# Altium PCB CH595X-R0-1v1.PcbDoc
Units mil, origin at the board's own origin, x right, y up, seen from the top; angles counter-clockwise.
Board outline 3385.83 x 3110.24 mil, 2 copper layers (Top Layer, Bottom Layer); 43 components, 46 nets, 190 pads, 749 vias.
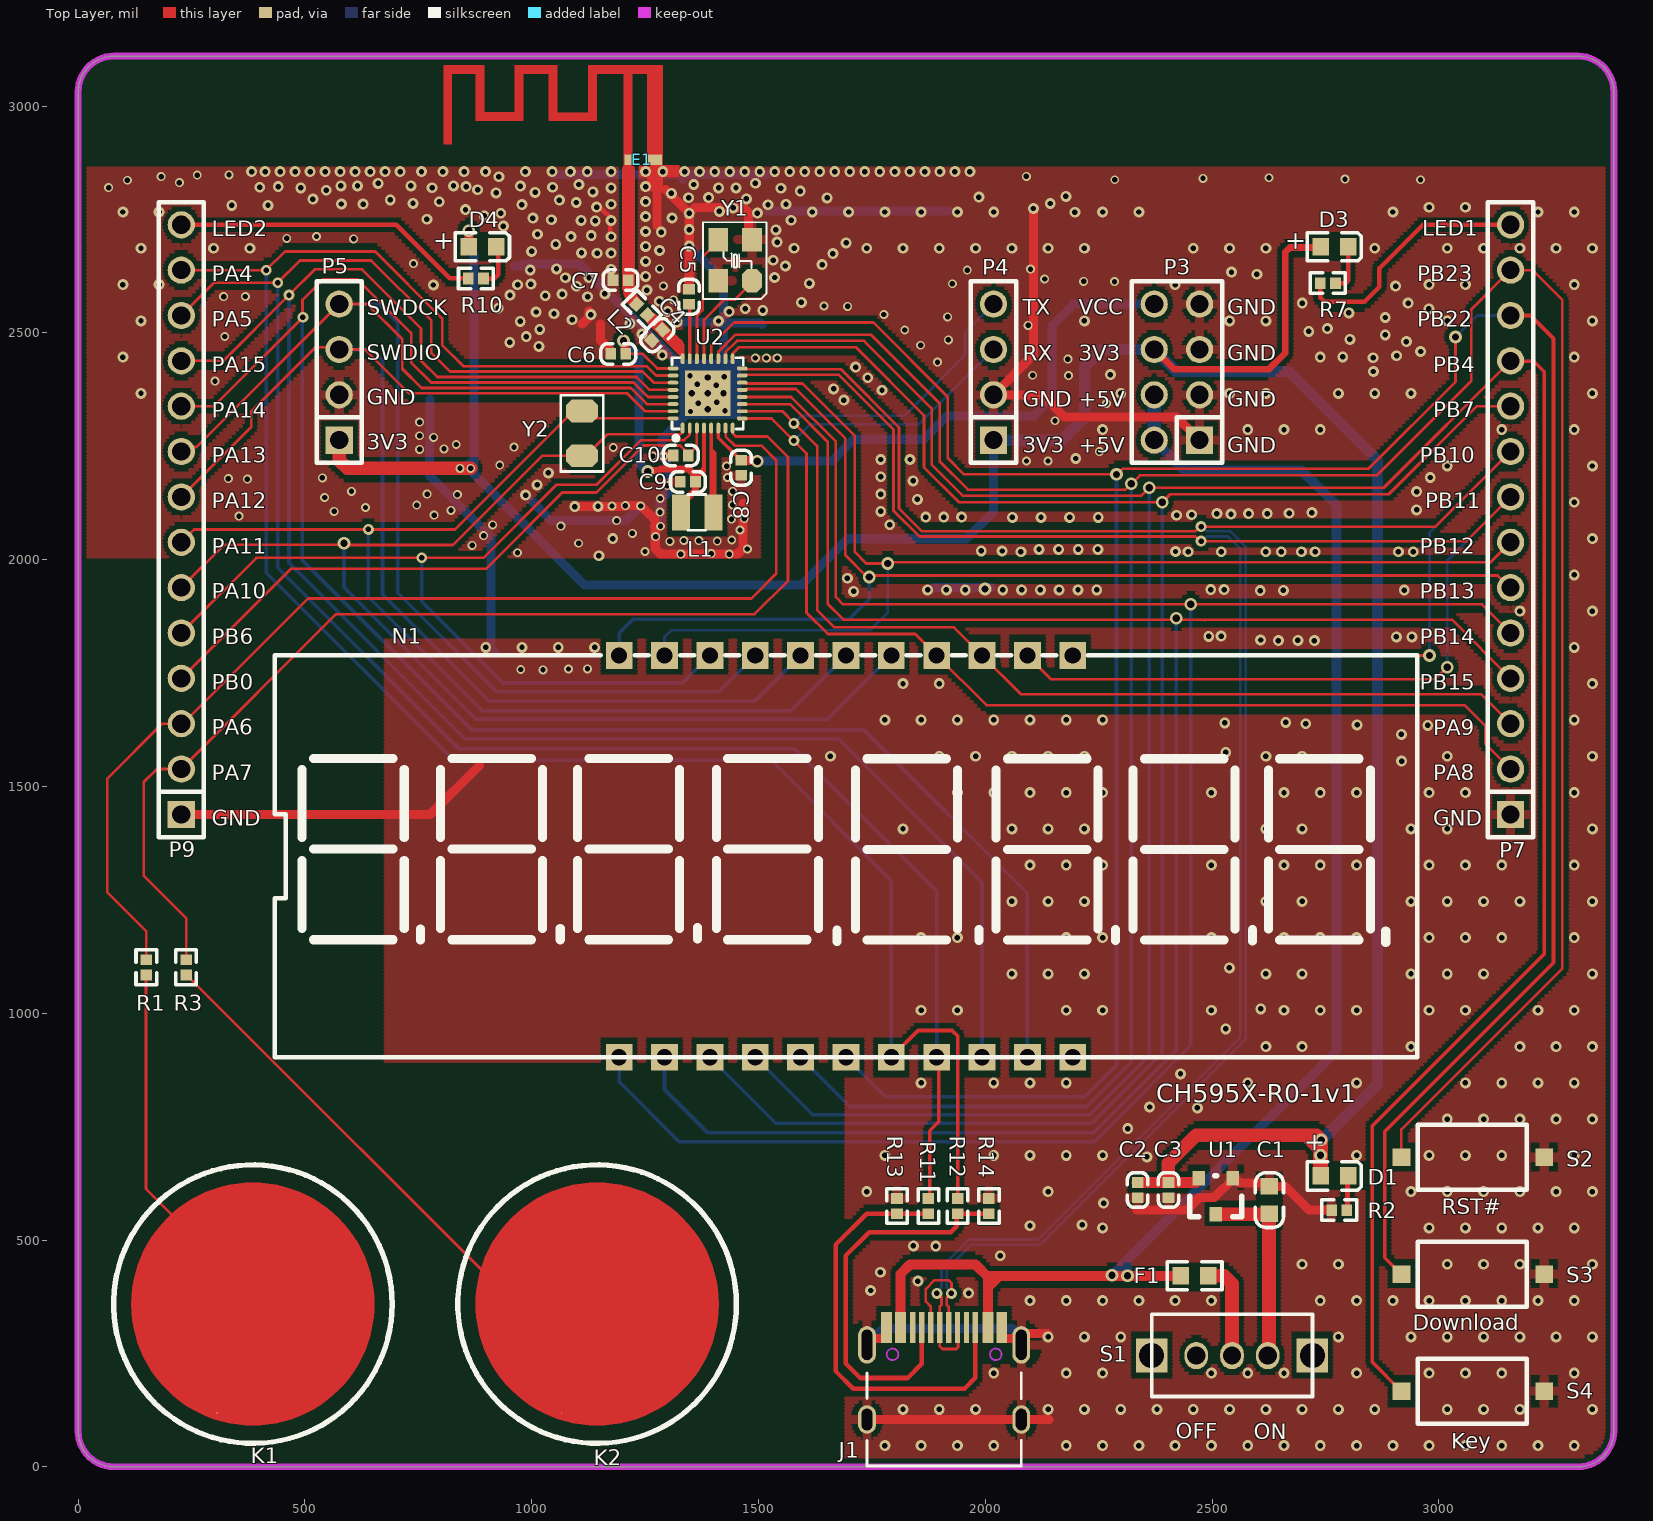
[diagram p0: Top Layer view]
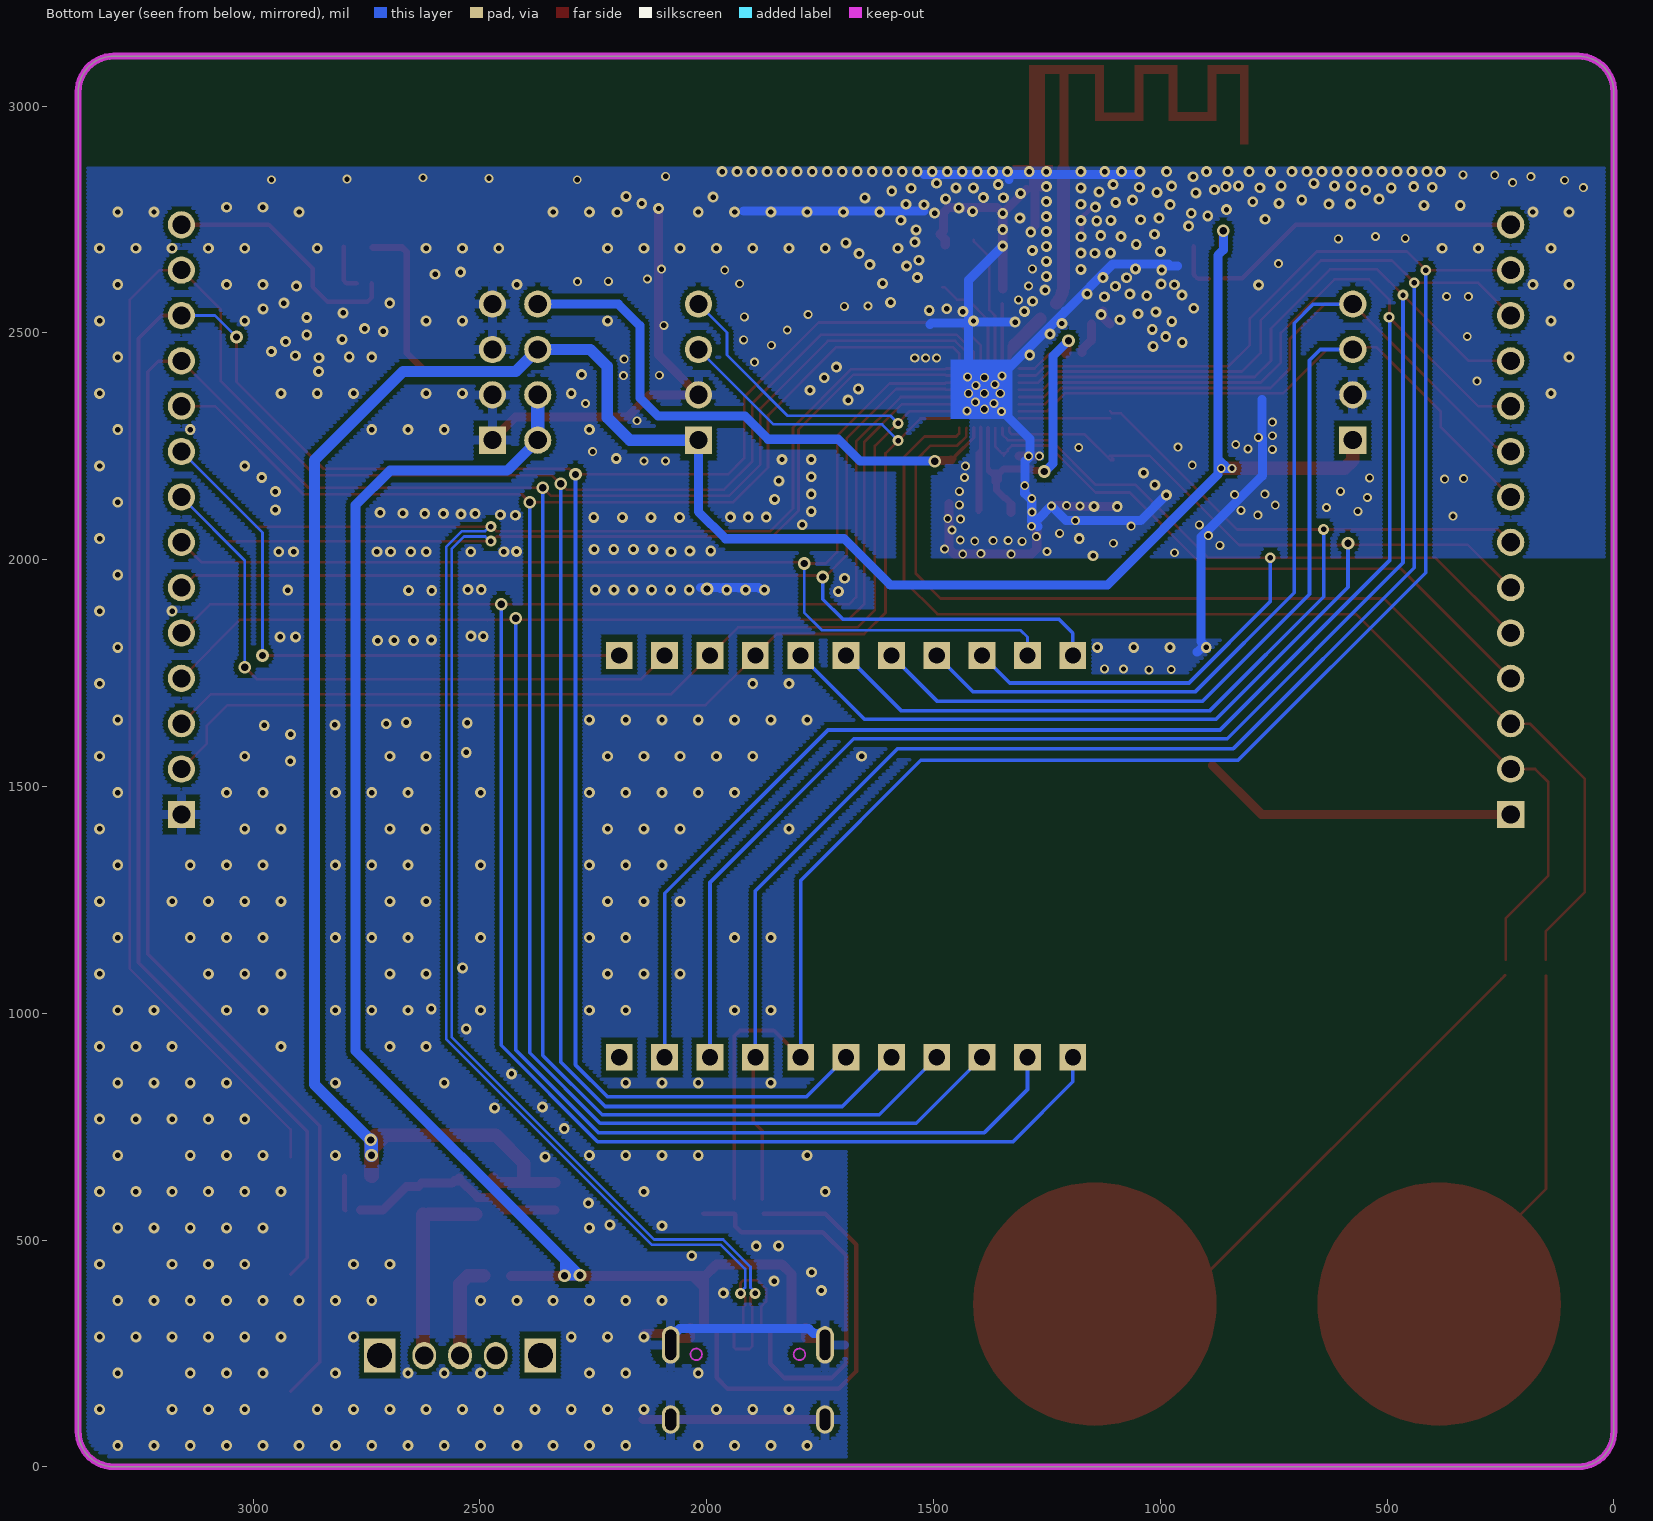
[diagram p1: Bottom Layer view, seen from below]

## Layer stack, top to bottom
Top Solder: solder mask 0.4, Solder Resist, Dk 3.5
Top Layer: signal copper 1.4
Dielectric 1: dielectric 12.6, FR-4, Dk 4.8
Bottom Layer: signal copper 1.4
Bottom Solder: solder mask 0.4, Solder Resist, Dk 3.5

## Board outline
0,78.74 ccw(c78.74,78.74) 78.74,0 3307.29,0 3307.09,0 ccw(c3307.09,78.74) 3385.83,78.74 3385.83,3031.5 ccw(c3307.09,3031.5) 3307.09,3110.24 78.74,3110.24 ccw(c78.74,3031.5) 0,3031.5

## Design rules (kind name [scope] priority, off if disabled: settings)
Clearance Clearance_2 [InNet('ANT')OR InNet('NetE1_1') OR InNet('NetC7_2') vs InPolygon] p1: gap=6 ignorepadtopadclearanceinfootprint=FALSE
Clearance Clearance_1 [InPolygon] p2: gap=10 ignorepadtopadclearanceinfootprint=FALSE
Clearance [All] p3: gap=6 ignorepadtopadclearanceinfootprint=FALSE except(8: Arc-Via Track-Via SMDPad-Via THPad-Via Via-Via Via-Fill Via-Poly Via-Region Via-Hole)
ComponentClearance [All] p1 off: gap=10 collisioncheckmode=3 verticalgap=10 showdistances=FALSE
DiffPairsRouting [All] p1: maxlimit=10 minlimit=6 mostfreqgap=8 toplayer_minwidth=6 toplayer_maxwidth=15 toplayer_prefwidth=8 bottomlayer_minwidth=6 bottomlayer_maxwidth=15 bottomlayer_prefwidth=8 maxuncoupledlength=500
MinimumSolderMaskSliver [All] p1 off: minsoldermaskwidth=10
PolygonConnect PolygonConnect_2 [InComponentClass('New Class')] p1: connectstyle=Direct reliefconductorwidth=10 reliefentries=4 polygonreliefangle="90 Angle" airgapwidth=10
PolygonConnect PolygonConnect_1 [IsVia] p2: connectstyle=Direct reliefconductorwidth=10 reliefentries=4 polygonreliefangle="90 Angle" airgapwidth=10
PolygonConnect [All] p3: connectstyle=Relief reliefconductorwidth=20 reliefentries=4 polygonreliefangle="90 Angle" airgapwidth=10
RoutingVias [All] p1: holewidth=16 width=28 viastyle="Through Hole" minholewidth=11.81 minwidth=19.68 maxholewidth=28 maxwidth=50
SilkToSilkClearance [All] p1 off: silktosilkclearance=10
SilkToSolderMaskClearance [IsPad] p1 off: minsilkscreentomaskgap=10 clearancetoexposedcopper=TRUE
SolderMaskExpansion [All] p1: expansion=2 istentingtop=FALSE
Width [All] p1: maxlimit=100 minlimit=6 preferedwidth=10
25 further rules are at their usual default settings.

## Classes and differential pairs
component class "New Class": C4 C7
differential pair NewDifferentialPair2: +PB10 -PB11

## Components (designator, comment, footprint, x,y, rotation, side; value= is the part's Value field where it differs from the comment)
C1 "10uF" 0603_C 2626.57,557.73 r90 top
C2 "2.2uF" 0402_C 2336.11,626.9 r0 top
C3 "0.1uF" 0402_C 2404.01,626.9 r0 top
C4 "NC" 0402_C 1265.07,2483.18 r135 top
C5 "0.47uF" 0402_C 1346.78,2562.84 r180 top
C6 "0.1uF" 0402_C 1207.61,2453.74 r270 top
C7 "NC" 0402_C 1179.19,2616.48 r90 top
C8 "2.2uF" 0402_C 1461.94,2186.02 r180 top
C9 "4.7uF" 0402_C 1327.8,2171.46 r90 top
C10 "1nF" 0402_C 1311.95,2229.77 r90 top
D1 "power" 0603+ 2739.99,641.25 r0 top
D3 "LED1" 0603+ 2739.99,2689.81 r0 top
D4 "LED2" 0603+ 861.67,2689.81 r0 top
E1 "ANTENNA" ANT-F-1-2.4G-1.6mmFR4 1213.08,2882.04 r0 top
F1 "500mA" 0603 2431.29,421.09 r0 top
J1 "TYPE-C-Receptacle-2.0" TYPE-C-Receptacle-2.0 1909.45,307.03 r0 top
K1 "TOUCHKEY" TOUCHKEY-13.6mm-S 385.33,358.74 r90 top
K2 "TOUCHKEY" TOUCHKEY-13.6mm-S 1144.33,358.74 r90 top
L1 "10uH" SMD_2x2mm 1365.25,2104.16 r180 top
L2 "0" 0402 1231.37,2563.23 r315 top
N1 "GDC0103T" EDC103 1192.91,903.01 r0 top
P3 "HEADER 4x2" IDC8-2.54mm 2472.65,2263.51 r180 top
P4 "HEADER 4" SIP4-2.54mm 2018.32,2263.51 r180 top
P5 "HEADER 4" SIP4-2.54mm 575.69,2263.51 r180 top
P7 "Header 14" SIP14-2.54mm 3158.35,1438.35 r180 top
P9 "Header 14" SIP14-2.54mm 227.48,1438.35 r180 top
R1 "0Ω" 0402 150.33,1117.85 r270 top
R2 "1K" 0402 2797.31,565.84 r180 top
R3 "0Ω" 0402 238.3,1117.85 r270 top
R7 "1K" 0402 2738.61,2609.74 r0 top
R10 "1K" 0402 860.29,2619.81 r0 top
R11 "NC(0)" 0402 1874.49,591.63 r270 top
R12 "NC(0)" 0402 1939.12,591.63 r270 top
R13 "5.1K (5101) ±1%" 0402 1805.45,558.17 r90 top
R14 "5.1K (5101) ±1%" 0402 2008.16,558.17 r90 top
S1 "SW SPDT" SW1 2544.09,245.2 r180 top
S2 "RST#" SMD_6.1x3.65x2.5mm-KEY 3232.43,682.54 r180 top
S3 "Download" SMD_6.1x3.65x2.5mm-KEY 3232.43,424.63 r180 top
S4 "Key" SMD_6.1x3.65x2.5mm-KEY 3232.43,166.71 r180 top
U1 "6219P33M" SOT-23 2545.7,636.42 r180 top
U2 "CH595X" QFN32_4X4 1387.92,2366.55 r0 top
Y1 "32M" XT3225 1485.88,2614.95 r90 top
Y2 "32.768K" fc-135 1111.11,2229.34 r90 top

## Footprints (in the part's own frame and the unit in brackets; to place one, negate y for a bottom-side part, rotate by r counter-clockwise, add the part's x,y. Pads: shape width x height; smd on the part's side, far side on the other; paste and mask are expansions set on the pad)
0402 [mm]
  rect 0.6x0.65 smd mask+0.051: 1(0,0) 2(0.85,0)
  silkscreen extent -0.55,-0.58 1.4,0.57
0402_C [mm]
  rect 0.65x0.6 smd mask+0.051: 1(0,0) 2(0,-0.85)
  silkscreen extent -0.58,-1.4 0.57,0.55
0603 [mm]
  rect 0.93x0.98 smd: 1(0,0) 2(1.54,0)
  silkscreen extent -0.76,-0.79 2.3,0.79
0603+ [mm]
  rect 0.93x0.98 smd: 1(0,0) 2(1.54,0)
  silkscreen extent -0.76,-0.79 2.27,0.79
0603_C [mm]
  rect 0.93x0.98 smd mask+0.051: 1(0,0) 2(1.54,0)
  silkscreen extent -0.76,-0.79 2.31,0.79
ANT-F-1-2.4G-1.6mmFR4 [mm]
  rect 0.8x0.6 smd mask+0: 0(1.483,0)
  rect 0.4x0.6 smd mask+0: 1(0,0)
  Top Layer region: 0.24,5.027 -0.26,5.027 -0.26,-0.304 0.24,-0.304
  Top Layer region: 1.94,5.002 1.04,5.002 1.04,-0.304 1.94,-0.304
  Top Layer region: 1.94,5.296 -2.26,5.296 -2.26,4.796 1.94,4.796
  Top Layer region: -1.76,4.977 -2.26,4.977 -2.26,2.157 -1.76,2.157
  Top Layer region: -1.85,2.651 -4.39,2.651 -4.39,2.156 -1.85,2.156
  Top Layer region: -3.96,4.976 -4.46,4.976 -4.46,2.156 -3.96,2.156
  Top Layer region: -3.96,5.296 -6.36,5.296 -6.36,4.796 -3.96,4.796
  Top Layer region: -5.86,4.977 -6.36,4.977 -6.36,2.157 -5.86,2.157
  Top Layer region: -5.875,2.657 -8.364,2.657 -8.364,2.157 -5.875,2.157
  Top Layer region: -8.06,4.977 -8.56,4.977 -8.56,2.157 -8.06,2.157
  Top Layer region: -8.06,5.296 -10.36,5.296 -10.36,4.796 -8.06,4.796
  Top Layer region: -9.86,4.976 -10.36,4.976 -10.36,0.856 -9.86,0.856
EDC103 [mm]
  rect 1.5x1.5 hole 0.9: 1(0,0) 2(2.54,0) 3(5.08,0) 4(7.62,0) 5(10.16,0) 6(12.7,0) 7(15.24,0) 8(17.78,0) 9(20.32,0) 10(22.86,0) 11(25.4,0) 12(25.4,22.5) 13(22.86,22.5) 14(20.32,22.5) 15(17.78,22.5) 16(15.24,22.5) 17(12.7,22.5) 18(10.16,22.5) 19(7.62,22.5) 20(5.08,22.5) 21(2.54,22.5) 22(0,22.5)
  silkscreen extent -19.3,0 44.7,22.5
fc-135 [mil]
  oct 50x70 smd: 1(0,0) 2(98.43,0)
  silkscreen extent -35,-47 133,47
IDC8-2.54mm [mil]
  rect 60x60 hole 40: 1(0,0)
  round 60 hole 40: 2(100,0) 3(0,-100) 4(100,-100) 5(0,-200) 6(100,-200) 7(0,-300) 8(100,-300)
  silkscreen extent -50,-350 150,50
QFN32_4X4 [mm]
  rect 2.54x2.54 smd mask+0.051: 0(0,0)
  round 0.508 hole 0.356: 0(0,0)
  oval 0.22x0.6 smd mask+0.051: 1(-1.4,-1.936) 2(-1,-1.936) 3(-0.6,-1.936) 4(-0.2,-1.936) 5(0.2,-1.936) 6(0.6,-1.936) 7(1,-1.936) 8(1.4,-1.936) 17(1.4,1.936) 18(1,1.936) 19(0.6,1.936) 20(0.2,1.936) 21(-0.2,1.936) 22(-0.6,1.936) 23(-1,1.936) 24(-1.4,1.936)
  oval 0.6x0.22 smd mask+0.051: 9(1.936,-1.4) 10(1.936,-1) 11(1.936,-0.6) 12(1.936,-0.2) 13(1.936,0.2) 14(1.936,0.6) 15(1.936,1) 16(1.936,1.4) 25(-1.936,1.4) 26(-1.936,1) 27(-1.936,0.6) 28(-1.936,0.2) 29(-1.936,-0.2) 30(-1.936,-0.6) 31(-1.936,-1) 32(-1.936,-1.4)
  silkscreen extent -2,-2.63 2,2
SIP4-2.54mm [mil]
  rect 60x60 hole 40: 1(0,0)
  round 60 hole 40: 2(0,-100) 3(0,-200) 4(0,-300)
  silkscreen extent -50,-350 50,50
SIP14-2.54mm [mil]
  rect 60x60 hole 40: 1(0,0)
  round 60 hole 40: 2(0,-100) 3(0,-200) 4(0,-300) 5(0,-400) 6(0,-500) 7(0,-600) 8(0,-700) 9(0,-800) 10(0,-900) 11(0,-1000) 12(0,-1100) 13(0,-1200) 14(0,-1300)
  silkscreen extent -50,-1350 50,50
SMD_2x2mm [mm]
  rect 1x2 smd: 1(-0.905,0) 2(0.905,0)
  silkscreen extent -0.47,-1 0.53,1
SMD_6.1x3.65x2.5mm-KEY [mm]
  rect 1x1 smd: 1(0,0) 2(8,0)
  silkscreen extent 0.98,-1.83 7.08,1.83
SOT-23 [mm]
  rect 0.7x0.8 smd: 1(0,0) 2(1.9,0) 3(0.95,2.02)
  silkscreen extent -0.51,-0.13 2.41,2.16
SW1 [mm]
  rect 1.75x1.9 hole 1.4: 0(-4.5,0) 0(4.5,0)
  oval 1.321x1.524 hole 1.016: 1(0,0) 2(-2,0) 3(2,0)
  silkscreen extent -4.51,-2.31 4.5,2.29
TOUCHKEY-13.6mm-S [mil]
  round 2 smd: 1(-239.72,79.09)
  Top Layer region: -267.72,0 -247.34,-102.45 -189.3,-189.3 -102.45,-247.34 0,-267.72 0,-267.72 102.45,-247.34 189.3,-189.3 247.34,-102.45 267.72,0 267.72,0 247.34,102.45 189.3,189.3 102.45,247.34 0,267.72 0,267.72 -102.45,247.34 -189.3,189.3 -247.34,102.45 -267.72,0
  silkscreen extent -307,-307 307,307
TYPE-C-Receptacle-2.0 [mm]
  oval 1x1.6 hole 0.6 slot 1.2 at 90 deg: 0(-4.32,-5.15) 0(4.32,-5.15)
  oval 1x2.1 hole 0.6 slot 1.7 at 90 deg: 0(-4.32,-0.97) 0(4.32,-0.97)
  rect 0.6x1.75 smd mask+0.051: A1(-3.225,0) A4(-2.45,0) B1(3.225,0) B4(2.45,0)
  rect 0.3x1.75 smd mask+0.051: A5(-1.25,0) A6(-0.25,0) A7(0.25,0) A8(1.25,0) B5(1.75,0) B6(0.75,0) B7(-0.75,0) B8(-1.75,0)
  Keep-Out Layer circle w0.1: c2.89,-1.5 r0.325
  Keep-Out Layer circle w0.1: c-2.89,-1.5 r0.325
  silkscreen extent -4.32,-7.75 4.32,-2.55
XT3225 [mm]
  oct 1.3x1.1 smd: 1(0,0)
  rect 1.3x1.1 smd: 2(2.3,0) 3(2.3,1.9) 4(0,1.9)
  silkscreen extent -1.02,-0.8 3.27,2.74

## Part data
C1 C2 C3 C4 C5 C6 C7 C8 C9 C10: library part CAP, "Capacitor"
D1: library part LED0, "Typical INFRARED GaAs LED", LatestRevisionDate=08-Jul-2005, LatestRevisionNote="Mech Layer 1 removed.", PackageDescription="LED; 2 Leads", PackageReference=LED-0, Published=8-Jun-2000, Publisher="Altium Limited"
D3 D4: library part LED
E1: "Generic Antenna"
F1: library part FUSE1, "Fuse"
J1: "Type-C USB2.0 母座"
L1 L2: library part INDUCTOR
N1: library part EDC103
P3: "Header, 4-Pin, Dual row"
P7 P9: "Header, 14-Pin", LatestRevisionDate=17-Jul-2002, LatestRevisionNote="Re-released for DXP Platform.", Publisher="Altium Limited"
R1 R3: library part "Res Semi", "Semiconductor Resistor", LatestRevisionDate=17-Jul-2002, LatestRevisionNote="Re-released for DXP Platform.", PackageReference=AXIAL-0.5, Published=8-Jun-2000, Publisher="Altium Limited"
R2 R7 R10 R11 R12 R13 R14: library part RES
S2 S3 S4: library part KEY1
U2: "RISC-V MCU with BLE/USB/ADC/SPI/4*UART/I2C/LCD/LEDC"
Y1 Y2: library part XTAL, "Crystal Oscillator", LatestRevisionDate=17-Jul-2002, LatestRevisionNote="Re-released for DXP Platform.", PackageDescription="Crystal, Thru-Hole; 2 Leads; Body 3.1 x 8.2 mm (Dia.xH)", PackageReference=R38, Published=8-Jun-2000, Publisher="Altium Limited"

## Via types
v1: diameter 24, hole 12, Top Layer to Bottom Layer, tented both sides, 604 vias
v2: diameter 19.68, hole 11.81, Top Layer to Bottom Layer, tented both sides, 117 vias
v3: diameter 28, hole 16, Top Layer to Bottom Layer, tented both sides, 21 vias
v4: diameter 20, hole 14, Top Layer to Bottom Layer, tented both sides, 4 vias
v5: diameter 20, hole 12, Top Layer to Bottom Layer, tented both sides, 3 vias

## Nets (pads, with @x,y where several pads share a name; then routed paths per layer and width w, separated by ;. In a path a pad name is that pad's centre, name@x,y a point inside that pad or via, vN(x,y) a via of type N, cw(c..) or ccw(c..) an arc to the next point about the centre after c; other vN are vias at no path point)
3V3: C2.1 C3.1 D1.1 D3.1 D4.1 P3.6 P4.1 P5.1 U1.2 | length 6468
  Top Layer w15: P3.6 2416.15,2420.01 2625.71,2420.01 2661.43,2455.73 2661.43,2678.31 2671.58,2688.46 D3.1@2736.4,2688.46
  Top Layer w20: D4.1@860.74,2691.62 861.39,2692.27 861.39,2724.67 v3(861.11,2724.95)
  Top Layer w25: C2.1@2335.02,626.97 2403.36,626.97 2463.12,626.97 2469.32,633.17 2469.61,633.17 2469.61,633.46 2470.89,634.74 U1.2
  Top Layer w30: P5.1 575.69,2218.91 593.26,2201.33 v2(842.03,2201.33) v2(865.65,2201.33) ; C3.1@2403.36,629.97 2403.36,669.51 2464.88,731.03 2707.43,731.03 ; D1.1@2738.06,641.25 2738.06,700.4 2707.43,731.03 ; D1.1 2740.58,641.83 v3(2740.58,720.75) 2730.29,731.03 2707.43,731.03
  Bottom Layer w20: v2(842.03,2201.33) 851.64,2201.33 v2(865.65,2201.33) ; 858.65,2208.34 873.03,2222.72 ; v3(861.11,2724.95) 861.11,2682.87 873.03,2670.95 873.03,2222.72 ; 872.94,2187.81 1116.25,1944.5 1595.41,1944.5 1697.06,2046.15 1958.48,2046.15 2018.32,2105.99 P4.1 ; 873.03,2187.9 873.03,2201.33 873.03,2222.72
  Bottom Layer w25: P4.1 2169.94,2263.51 2219.55,2313.12 2219.55,2426.22 2256.84,2463.51 P3.6 2421.15,2415.01 2669.53,2415.01 2864.72,2219.82 2864.72,843.13 2743.84,722.25 2742.89,722.25 2741.77,721.13 v3@2741.77,720.18
  Bottom Layer w30: v3(2739.32,686.81) 2739.32,718.68 v3@2741.77,721.13
+5V: F1.1 J1.A4 J1.B4 P3.2 P3.4 | length 3437
  Top Layer w22: J1.A4 1812.99,424.98 1833.68,445.68 1979.01,445.68 2005.91,418.77 ; J1.B4 2005.91,395.59 ; v3(2313.53,421.08) 2279.56,421.09 2031.41,421.09 ; v3(2313.53,421.08) F1.1 ; 2005.91,395.59 2005.91,418.77 ; 2005.91,395.59 2031.41,421.09 ; 2005.91,418.77 2007.53,418.77 2009.85,421.09 2031.41,421.09
  Bottom Layer w22: v3(2313.53,421.08) v3@2312.91,421.7 ; P3.2 2440.01,2196.15 2698.56,2196.15 2774.22,2120.49 2774.22,916.97 2312.91,455.66 ; v3@2312.91,421.7 2312.91,455.66 ; v3@2312.91,421.7 2280.18,421.7 v3(2279.56,422.31) 2312.91,455.66
  Bottom Layer w30: P3.2 P3.4
ANT: C4.2 L2.2 U2.24 | length 184.8
  Top Layer w8: 1313.48,2467.6 1328.92,2452.15 cw(c1319.54,2442.77) U2.24 U2.24@1332.8,2445.36 ; 1320.7,2474.58 cw(c1291.48,2445.36) U2.24@1332.8,2445.36 ; 1327.5,2482.04 cw(c1314.68,2469.23) 1332.8,2469.23 U2.24@1332.8,2445.36
  Top Layer w28.1: 1264.59,2530.69 1320.7,2474.58
BOOT: N1.6 P7.12 S3.2 U2.20 | length 6545.8
  Top Layer w6: U2.20 1395.8,2472.57 1446.28,2523.06 1753.22,2523.06 1917.34,2358.94 1917.34,2223.71 1952.89,2188.16 2291.53,2188.16 2303.93,2200.56 2845.54,2200.56 3036.73,2391.74 v3(3036.73,2490.94)
  Top Layer w8: S3.2 2880.95,461.14 2880.95,739.4 3252.94,1111.38 3252.94,2487.43 3202.02,2538.35 P7.12
  Bottom Layer w6: v3(3036.73,2490.94) 3084.14,2538.35 P7.12
  Bottom Layer w8: N1.6 1780.2,815.73 2219.05,815.73 2289.41,886.09 2289.41,1367.61 v3(2289.41,2188.05)
CC1: J1.A5 R12.2 R14.1 | length 881.3
  Top Layer w10: J1.A5 1860.24,227.02 1829.03,195.8 1724.16,195.8 1691.96,228.01 1691.96,464.98 1744.41,517.44 1924,517.44 1937.28,530.72 1937.28,556.33 R12.2 R14.1
CC2: J1.B5 R11.2 R13.1 | length 957.3
  Top Layer w10: R13.1@1804.47,558.17 R11.2 ; R13.1 1738.55,558.17 1669.97,489.58 1669.97,211.17 1708.76,172.38 1954.27,172.38 1978.35,196.46 J1.B5
GND: C1.2 C2.2 C3.2 C4.1 C5.2 C6.2 C7.1 C8.1 C9.1 C10.1 E1.0 J1.0 J1.A1 J1.B1 P3.1 P3.3 P3.5 P3.7 P4.2 P5.2 P7.1 P9.1 R2.2 R13.2 R14.2 S2.1 S3.1 S4.1 U1.1 U2.0 Y1.2 Y1.4 | length 7910.7
  Top Layer w10: v1(1143.16,2777.2) 1145.84,2774.52 1152.49,2774.52 1164.66,2762.35 1165.95,2762.35 1173.02,2755.28 v1@1173.02,2706.7 ; v2(1266.68,2228.24) v2@1267.45,2229.01 ; C10.1@1311.18,2229.01 C10.1
  Top Layer w20: P9.1 776.99,1438.35 884.72,1546.08 ; v1(1095.02,2117.02) 1095.17,2117.17 1146.1,2117.17 v1(1146.25,2117.32) 1176.34,2117.32 1176.6,2117.59 1205.05,2117.59 v2(1206.51,2119.05) 1240.88,2119.05 1272.18,2087.75 ; 1111.11,2519.62 1129.81,2538.33 v1@1129.54,2538.6 ; v1@1126.68,2535.74 v1@1126.68,2548.58 ; 1152.11,2519.62 1152.11,2483.83 1172.33,2463.6 C6.2@1172.33,2456.54 ; v2@1267.45,2229.01 C10.1@1311.18,2229.01 ; 1271.17,2073.36 1271.17,2072.59 1272.4,2071.36 ; 1272.18,2071.36 1272.18,2071.75 ; 1272.4,2083.36 1272.4,2024.21 1284.11,2012.49 1454.09,2012.49 1465.8,2024.21 1465.8,2124 ; 1276.68,2736.41 E1.0@1276.68,2871.58 ; 1294.68,2816.41 v1(1347.44,2763.65) ; C5.2@1347.44,2596.97 v1(1347.44,2727.64) v1(1347.44,2763.65) ; Y1.2@1474.22,2694.04 1474.22,2705.85 1485.88,2717.5 1477.99,2725.39 1477.99,2765.05 1466.27,2776.76 1360.56,2776.76 v1(1347.44,2763.65) ; J1.0@1739.37,104.28 2079.53,104.28 2140.41,104.28 ; J1.0@1739.37,268.84 1739.37,273.64 1748.32,282.58 1780.67,282.58 1782.48,284.39 J1.A1 ; J1.B1 2036.42,284.39 2038.23,282.58 2076.86,282.58 J1.0@2079.53,285.26 ; J1.0@2079.53,268.84 J1.0@2079.53,285.26 ; v1(2106.15,2774.25) 2106.47,2773.92 2106.47,2496.07 2106.47,2451.67 P4.2 2125.51,2363.51 2174.39,2314.63 2421.53,2314.63 P3.1 ; v1@2136.74,294.2 2088.48,294.2 J1.0@2079.53,285.26 ; 2335.02,566.34 2444.88,566.34 2472.41,593.87 2505.12,593.87 U1.1@2545.7,634.45 ; U1.1 U1.1@2545.7,634.45 ; R2.2 2714.29,565.84 2661.77,618.36 2635.86,618.36 2628.66,625.55 2561.19,625.55 2556.08,630.67 2549.48,630.67 U1.1@2545.7,634.45
  Bottom Layer w20: 775.67,2352.77 775.67,2267.55 775.11,2266.99 775.11,2184.98 910.34,2049.75 910.34,1819.3 898.7,1807.66 v1(898.7,1806.58) ; v1@898.48,1807.89 v1@900.01,1807.89 ; v1@903.6,1811.48 919,1796.08 ; 961.69,2647.69 981.62,2647.69 ; 981.62,2652.16 1104.33,2652.16 1207.9,2548.58 1210.44,2548.58 1210.44,2546.04 1387.92,2368.56 1387.92,2366.55 v2@1352.95,2331.58 ; v1(986.65,2142.52) 1043.15,2086.02 1207.68,2086.02 v2(1240.13,2118.47) 1269.23,2089.36 ; v1@1049.13,2849.01 v1@1334.02,2849.01 ; 1269.23,2073.36 1271.17,2073.36 1283.48,2085.66 1283.48,2130.84 1298.85,2146.21 1298.85,2159.22 v2@1298.16,2159.92 ; 1298.16,2175.92 1298.16,2217.3 1287.22,2228.24 1287.22,2265.85 1352.92,2331.55 v2@1352.92,2331.62 ; v1(1320.11,2523.9) 1420.78,2523.9 v1@1422.92,2521.76 ; 1334.02,2838.69 v1@1334.02,2849.01 ; v1(1347.44,2691.63) 1422.92,2616.15 v1@1422.92,2521.76 ; v2@1422.92,2401.49 v1@1422.92,2521.76 ; 1508.08,2518.3 1504.63,2521.76 v1@1422.92,2521.76 ; 1521,2769.01 1918.39,2769.01 ; 1521,2849.01 v1@1334.02,2849.01 ; J1.0@1739.37,268.84 1739.37,285.26 1748.32,294.2 1764.73,294.2 1775.19,304.66 2060.12,304.66 2079.53,285.26 J1.0@2079.53,268.84 ; v1@1884,1936.8 1885.92,1938.73 1925.18,1938.73 1926.21,1937.7 1928.78,1937.7 1929.8,1938.73 1964.11,1938.73 1966.43,1936.41 1967.19,1936.41 1968.28,1937.49 1969.36,1936.41 1970.12,1936.41 1972.44,1938.73 2013.18,1938.73
  other v1: 1778.7,46.58 1858.7,46.58 1938.7,46.58 2018.7,46.58 2178.7,46.58 2258.7,46.58 2338.7,46.58 2418.7,46.58 2498.7,46.58 2578.7,46.58 2658.7,46.58 2738.7,46.58 2818.7,46.58 2898.7,46.58 2978.7,46.58 3058.7,46.58 3138.7,46.58 3218.7,46.58 3298.7,46.58 1818.7,126.58 1898.7,126.58 1978.7,126.58 2138.7,126.58 2218.7,126.58 2298.7,126.58 2378.7,126.58 2458.7,126.58 2538.7,126.58 2618.7,126.58 2698.7,126.58 2778.7,126.58 2858.7,126.58 3018.7,126.58 3098.7,126.58 3178.7,126.58 3338.7,126.58 2018.7,206.58 2178.7,206.58 2258.7,206.58 2498.7,206.58 2578.7,206.58 2658.7,206.58 2818.7,206.58 2978.7,206.58 3058.7,206.58 3138.7,206.58 3298.7,206.58 2138.7,286.58 2218.7,286.58 2298.7,286.58 2778.7,286.58 2938.7,286.58 3018.7,286.58 3098.7,286.58 3178.7,286.58 3258.7,286.58 3338.7,286.58 2098.7,366.58 2178.7,366.58 2258.7,366.58 2338.7,366.58 2418.7,366.58 2498.7,366.58 2738.7,366.58 2818.7,366.58 2898.7,366.58 2978.7,366.58 3058.7,366.58 3138.7,366.58 3218.7,366.58 3298.7,366.58 1963.21,382.92 1747.3,388.71 1851.64,409.37 1768.83,428.93 2698.7,446.58 2778.7,446.58 3018.7,446.58 3098.7,446.58 3178.7,446.58 3338.7,446.58 2033,465.41 1890.82,486.71 1841.74,487.17 2258.7,526.58 2978.7,526.58 3058.7,526.58 3138.7,526.58 3218.7,526.58 3298.7,526.58 2098.7,531.42 2213.71,533.29 2261.13,581.23 1738.7,606.58 2138.7,606.58 2938.7,606.58 3018.7,606.58 3098.7,606.58 3178.7,606.58 3258.7,606.58 3338.7,606.58 2356.47,683.25 1778.7,686.58 2018.7,686.58 2098.7,686.58 2178.7,686.58 2258.7,686.58 2818.7,686.58 2978.7,686.58 3058.7,686.58 3138.7,686.58 3298.7,686.58 2314.11,745.59 3018.7,766.58 3098.7,766.58 3178.7,766.58 3258.7,766.58 3338.7,766.58 2467.89,791.32 2362.23,793.33 1858.7,846.58 2018.7,846.58 2098.7,846.58 2178.7,846.58 2578.7,846.58 2818.7,846.58 3058.7,846.58 3138.7,846.58 3218.7,846.58 3298.7,846.58 2430.45,866.21 2618.7,926.58 2698.7,926.58 2938.7,926.58 3178.7,926.58 3258.7,926.58 3338.7,926.58 2530.35,965.33 1858.7,1006.58 1938.7,1006.58 2178.7,1006.58 2258.7,1006.58 2498.7,1006.58 2658.7,1006.58 2738.7,1006.58 2818.7,1006.58 2978.7,1006.58 3058.7,1006.58 3218.7,1006.58 3298.7,1006.58 2607.45,1009.48 2058.7,1086.58 2138.7,1086.58 2218.7,1086.58 2618.7,1086.58 2698.7,1086.58 2938.7,1086.58 3018.7,1086.58 3098.7,1086.58 3338.7,1086.58 2538.32,1100.09 1858.7,1166.58 1938.7,1166.58 2178.7,1166.58 2258.7,1166.58 2498.7,1166.58 2658.7,1166.58 2738.7,1166.58 2818.7,1166.58 2978.7,1166.58 3058.7,1166.58 3138.7,1166.58 3298.7,1166.58 2058.7,1246.58 2138.7,1246.58 2218.7,1246.58 2618.7,1246.58 2698.7,1246.58 2938.7,1246.58 3018.7,1246.58 3098.7,1246.58 3178.7,1246.58 3338.7,1246.58 2098.7,1326.58 2178.7,1326.58 2258.7,1326.58 2498.7,1326.58 2658.7,1326.58 2738.7,1326.58 2818.7,1326.58 2978.7,1326.58 3058.7,1326.58 3138.7,1326.58 3298.7,1326.58 1818.7,1406.58 2058.7,1406.58 2138.7,1406.58 2218.7,1406.58 2618.7,1406.58 2698.7,1406.58 2938.7,1406.58 3018.7,1406.58 3338.7,1406.58 1938.7,1486.58 2018.7,1486.58 2098.7,1486.58 2178.7,1486.58 2258.7,1486.58 2498.7,1486.58 2658.7,1486.58 2738.7,1486.58 2818.7,1486.58 2978.7,1486.58 3058.7,1486.58 3298.7,1486.58 2918.13,1555.84 1658.7,1566.58 1898.7,1566.58 1978.7,1566.58 2058.7,1566.58 2138.7,1566.58 2218.7,1566.58 2618.7,1566.58 2698.7,1566.58 3018.7,1566.58 3338.7,1566.58 2530.34,1575.1 2917.49,1614.8 2975.62,1634.76 2819.92,1635.77 2706.64,1638.34 2528.11,1640.24 2662.6,1641.31 1778.7,1646.58 1858.7,1646.58 1938.7,1646.58 2018.7,1646.58 2098.7,1646.58 2178.7,1646.58 2258.7,1646.58 3298.7,1646.58 1818.7,1726.58 1898.7,1726.58 3338.7,1726.58 978.7,1806.58 1058.7,1806.58 1138.7,1806.58 3298.7,1806.58 2646.39,1821.67 2689.24,1822.06 2725.79,1821.67 2607.09,1822.85 2906.6,1829.84 2940.79,1829.92 2492.74,1830.8 2520.19,1831.33 3178.7,1886.58 3338.7,1886.58 1709.8,1930.16 2606.21,1931.87 2657.41,1932.25 2923.86,1932.98 1873,1933.5 1914.43,1933.5 1955.87,1933.5 2038.73,1933.5 2080.16,1933.5 2121.59,1933.5 2163.03,1933.5 2204.46,1933.5 2245.89,1933.5 2497.29,1933.9 2526.65,1933.9 1696.17,1959.04 3298.7,1966.58 1148.05,2008.72 2078.51,2017.43 2419.51,2018.03 2447.19,2017.35 2520.26,2017.35 2618.53,2017.35 2652.53,2017.35 2696.93,2017.35 2727.15,2017.35 2910.74,2017.35 2943.62,2017.35 1991.13,2019.44 2037.12,2019.15 2118.57,2022.7 2161.81,2022.7 2205.05,2022.7 2248.28,2022.7 1178.7,2046.58 3338.7,2046.58 1789.57,2076.98 2059.73,2093.05 2122.9,2093.05 2186.07,2093.05 2249.25,2093.05 1868.81,2093.68 1908.42,2093.68 1948.02,2093.68 2421.91,2097.92 2454.94,2099.01 2541.85,2100.57 2510.62,2101.73 2580.81,2101.73 2621.69,2101.73 2669.88,2102.36 2720.34,2103.64 1769.57,2106.52 2950.94,2109.59 3298.7,2126.58 1850.33,2132.93 1769.57,2144.65 2951.19,2150.2 1012.05,2164.91 1841.15,2173.79 2981.24,2181.21 1769.57,2182.77 1036.78,2191.31 3018.7,2206.58 3338.7,2206.58 1769.57,2220.9 1834.07,2220.9 2199.68,2223.1 2258.7,2286.58 2578.7,2286.58 2658.7,2286.58 2738.7,2286.58 3138.7,2286.58 3298.7,2286.58 1688.46,2351.86 138.7,2366.58 2298.7,2366.58 2538.7,2366.58 2618.7,2366.58 2778.7,2366.58 2858.7,2366.58 2938.7,2366.58 3338.7,2366.58 1772.36,2373.5 1665.62,2376.42 1741.09,2401.02 2275.77,2407.94 2855.83,2414.91 1714.22,2424.58 2855.11,2445.22 98.7,2446.58 2738.7,2446.58 3298.7,2446.58 2788.14,2447.23 2907.07,2449.55 1287.81,2451.18 2959.75,2458.93 1015.98,2470.41 951.56,2479.08 2928.62,2480.75 2803.85,2485.54 988.06,2491.75 2882,2495.48 1243.24,2497.42 2713.25,2503.44 1017.7,2507.87 2754.28,2509.37 1217.19,2520.71 974.77,2525.4 138.7,2526.58 1411.93,2526.18 2218.7,2526.58 2538.7,2526.58 2618.7,2526.58 3018.7,2526.58 3338.7,2526.58 1089.03,2528.85 2882,2533.99 1130.58,2540.18 1049.17,2542.28 2801.76,2544.14 1009.66,2546.02 1435.32,2547.04 1299.63,2547.4 1509.41,2549.62 2978.26,2552.75 1470.96,2553.13 926.33,2554.24 2698.9,2565.62 2932.33,2565.74 1594.83,2567.26 1281.7,2569.81 1123.44,2579.62 1029.96,2581.86 952.23,2583.29 1067.21,2585.5 1161.36,2586.02 1253.91,2594.38 1099.11,2602.8 2904.75,2603 783.49,2605.57 968.82,2606.03 98.7,2606.58 178.7,2606.58 2418.7,2606.58 2978.7,2606.58 3058.7,2606.58 3298.7,2606.58 998.28,2607.55 1612.26,2609.25 1074.35,2621.59 1126.38,2622.01 1535.69,2622.15 1251.11,2624.52 2598.99,2629.4 2543,2633.89 996.89,2638.65 1175.22,2640.03 1054.77,2641.05 1559.54,2647.49 1640.24,2650.66 1251.11,2657.53 1532.25,2660.21 1664.28,2674.7 1144.41,2675.6 1175.22,2675.96 1109.87,2676.53 999.91,2679.85 1282.17,2681.59 138.7,2686.58 298.7,2686.58 378.7,2686.58 1578.7,2686.58 1738.7,2686.58 1818.7,2686.58 1898.7,2686.58 1978.7,2686.58 2058.7,2686.58 2138.7,2686.58 2218.7,2686.58 2458.7,2686.58 2538.7,2686.58 2618.7,2686.58 2858.7,2686.58 3018.7,2686.58 3098.7,2686.58 3178.7,2686.58 3258.7,2686.58 3338.7,2686.58 1251.11,2690.53 1052.96,2694.95 1693.42,2698.37 1541.25,2700.24 1175.22,2711.88 1086.76,2712.19 1131.48,2714.51 1012.9,2717.39 1285.78,2722.19 1251.11,2723.54 1538.46,2727.23 937.7,2735.44 1140.06,2746.9 1175.22,2747.81 1108.91,2748.11 1571.96,2748.25 1043.54,2749.32 768.99,2750.47 1002.55,2752.94 1309.65,2753.31 1251.11,2756.55 895.47,2757.86 931.81,2763.81 1497.5,2764.16 2197.61,2766 98.7,2766.58 178.7,2766.58 1618.7,2766.58 1698.7,2766.58 1778.7,2766.58 1858.7,2766.58 1938.7,2766.58 2018.7,2766.58 2258.7,2766.58 2338.7,2766.58 2898.7,2766.58 3218.7,2766.58 3298.7,2766.58 1414.04,2767.88 854.08,2771.79 1444.23,2775.6 2978.7,2776.99 3058.7,2776.99 338.7,2781.24 418.7,2781.24 978.56,2782.81 1521,2782.5 628.49,2784 1175.22,2783.73 1560.77,2783.61 580.38,2784.12 738.32,2785.47 2143.28,2785.25 1098.18,2787.45 796.32,2789.15 1251.11,2789.56 1061.02,2792.91 688.15,2793.37 517.66,2795.12 1473.3,2795.38 1346.01,2797.91 1651.53,2797.47 1389.95,2798.15 1985.98,2799.47 2177.66,2801.07 1307.98,2807.53 921.7,2808.82 1007.45,2809.87 1134.86,2810.76 1592.13,2812.5 547.09,2814.46 880.73,2815.54 1549.52,2818.85 490.86,2819.63 1175.22,2819.65 1411.99,2819.57 1450.5,2819.57 780.6,2820.08 400.6,2821.11 1046.03,2821.19 441.29,2822.59 855.53,2822.35 1251.11,2822.57 579.48,2823.93 616.02,2823.93 733.56,2823.98 975.23,2823.46 827.64,2824.09 1104.18,2827.17 1357.31,2827.13 661.58,2829.59 1493.25,2830 927.77,2844.21 382.45,2855.58 412.21,2855.58 445.3,2855.58 478.39,2855.58 511.49,2855.58 544.58,2855.58 577.67,2855.58 610.76,2855.58 643.85,2855.58 676.94,2855.58 710.04,2855.58 757.08,2855.58 804.12,2855.58 851.16,2855.58 898.21,2855.58 986.18,2855.58 1045.07,2855.58 1085.25,2855.58 1122.6,2855.58 1175.22,2855.58 1251.11,2855.58 1289.03,2855.58 1337.35,2855.58 1370.44,2855.58 1403.53,2855.58 1436.63,2855.58 1469.72,2855.58 1502.81,2855.58 1535.9,2855.58 1568.99,2855.58 1602.09,2855.58 1635.18,2855.58 1668.27,2855.58 1701.36,2855.58 1734.45,2855.58 1767.54,2855.58 1800.64,2855.58 1833.73,2855.58 1866.82,2855.58 1899.91,2855.58 1933,2855.58 1966.09,2855.58
  other v2: 1024.83,1756.98 975.99,1757.94 1081.32,1758.89 1122.97,1759.37 1328.97,2012.19 1435.55,2012.09 1395.8,2013.37 968.79,2015.21 1249.86,2017.98 1475.6,2023.57 868.88,2031.66 1103.44,2036.14 1304.71,2040.53 1409.1,2040.78 1368.72,2041.97 1335.64,2042.33 1441.1,2043.33 1273.22,2050.7 894.17,2052.91 1222.07,2058.11 1459.32,2065.28 1064.4,2074.05 1283.98,2073.68 913.91,2076.88 1187.23,2086.02 1440.63,2089.49 1468.66,2090.53 354.58,2095.94 784.94,2098.07 1282.98,2104.68 564.37,2106.68 822.06,2108.59 633.55,2115.11 1177.21,2118.2 746.59,2120.34 1443.2,2120.92 1283.48,2134.84 543.56,2137.05 836.29,2143.23 769.47,2144.47 602.61,2150.54 1443.06,2150.76 1298.85,2163.22 373.27,2177.58 331.38,2178.59 538.5,2180.35 1431.72,2181.03 1429.71,2206.36 929.59,2208.34 2091.09,2217.49 2138.35,2217.49 1290.22,2228.24 2251.75,2238.16 752.87,2243.37 806.71,2244.41 1179.9,2247.17 961.07,2248.1 833.64,2253.97 783.73,2269.64 752.87,2273.22 752.87,2303.08 2153.74,2306.23 1350.24,2326.62 1426.2,2327.99 1366.99,2344.54 2267.43,2344.24 1407.7,2347.27 1406.73,2384.47 1364.85,2386.61 301.7,2393.71 1424.84,2402.97 1349.07,2405.31 2183.71,2405.74 2104.61,2406.57 1894.83,2435.54 2182.05,2441.96 1857.58,2472.79 1918.67,2484.71 323.3,2492.16 1822.57,2506.32 2094.45,2516.62 1917.18,2535.37 1776.38,2540.59 1696.66,2558.47 1644.51,2559.21 1312.69,2572.68 320.76,2579.79 368.67,2580.12 1290.26,2603.52 1927.61,2608.38 2284.91,2612.95 2217,2613.51 2131,2618.81 1960.39,2638.18 2099.71,2640.42 1282.28,2641.31 739.46,2652.53 607.36,2707.37 460.07,2708.51 525.72,2712.51 67.4,2820.29 223.21,2831.24 108.57,2836.46 2285.5,2837.59 2959.58,2837.59 2793.31,2839.09 2480.23,2840.59 2625.53,2842.09 183.11,2844.61 2090.76,2845.08 262.67,2847.74 332.84,2848.37
  other v3: 1999.3,1935.5
  other v4: 1387.92,2331.62 1352.92,2366.55 1422.92,2366.55 1387.92,2401.49
  other v5: 1493.32,2444.6 1517.38,2444.6 1541.44,2444.6
LED1: P7.14 R7.1 | length 549
  Top Layer w10: R7.1 2738.61,2577.96 2747.43,2569.14 2836.65,2569.14 2869.17,2601.67 2869.17,2642.21 2965.31,2738.35 P7.14
LED2: P9.14 R10.1 | length 680.5
  Top Layer w10: P9.14 701.34,2738.35 819.45,2620.24 R10.1@859.07,2620.24
NetC7_2: C7.2 E1.1 L2.1 | length 299.4
  Top Layer w28.1: 1213.23,2861 1213.23,2761 1213.23,2607.04 ccw(c1275.18,2607.04) L2.1@1229.14,2565.59
NetD1_2: D1.2 R2.1 | length 76
  Top Layer w10: R2.1 2798.69,567.22 D1.2@2798.69,641.25
NetD3_2: D3.2 R7.2 | length 105.2
  Top Layer w10: R7.2 2794.76,2609.74 2800.62,2615.6 D3.2
NetD4_2: D4.2 R10.2 | length 94.5
  Top Layer w10: R10.2 915.34,2619.81 ; 919.03,2620.96 925.99,2627.92 D4.2@925.99,2690.96
NetF1_2: F1.2 S1.1 | length 217.8
  Top Layer w30: F1.2 2526.51,421.09 2544.09,403.52 S1.1
NetK1_1: K1.1 R1.2 | length 708.8
  Top Layer w6: R1.2@149.78,1082.43 149.78,612.47 318.65,443.6
NetK2_1: K2.1 R3.2 | length 1317.6
  Top Layer w6: R3.2@239.88,1083.7 239.96,1083.7 248.09,1075.58 248.09,1075.49 993.56,330.03 1245.27,330.03
NUM_COM0: N1.21 P7.7 U2.14 | length 2692
  Top Layer w6: U2.14 1472.34,2390.17 1474.22,2388.3 1597.09,2388.3 1712.4,2272.99 1712.4,2016.74 1737.68,1991.45 v3(1785.17,1991.45) 1788.06,1994.35 3114.35,1994.35 P7.7
  Bottom Layer w6: N1.21 1292.91,1829.4 1307.88,1844.37 1745.99,1844.37 1785.17,1883.55 v3(1785.17,1991.45)
NUM_COM1: N1.22 P7.6 U2.13 | length 2710.1
  Top Layer w6: U2.13 1472.34,2374.42 1474.22,2376.3 1582.36,2376.3 1691.55,2267.1 1691.55,2009.75 1739.57,1961.73 v3(1744.01,1961.73) 1747.19,1964.9 3129.75,1964.9 3156.31,1938.35 P7.6
  Bottom Layer w8: N1.22 1192.91,1838.13 1223.74,1868.96 1700.36,1868.96 1744.01,1912.62 v3(1744.01,1961.73)
NUM_COM2: N1.1 P7.5 U2.12 | length 4539.9
  Top Layer w6: U2.12 1572.14,2358.68 1670.65,2260.17 1670.65,1917.28 1686.35,1901.58 v3(2453.33,1901.58) 3095.11,1901.58 P7.5
  Bottom Layer w8: N1.1 1192.91,848.73 1324.68,716.97 2240.68,716.97 2453.33,929.62 v3(2453.33,1901.58)
NUM_COM3: N1.2 P7.4 U2.11 | length 4420.7
  Top Layer w6: U2.11 1569.53,2342.93 1652.84,2259.61 1652.84,1901.98 1687.06,1867.76 2421.33,1867.76 2483.22,1867.76 2483.92,1867.06 2484.63,1867.76 3028.93,1867.76 P7.4
  Bottom Layer w8: N1.2 1292.91,831.8 1387.82,736.9 2239.31,736.9 2421.33,918.91 v3(2421.33,1870.58)
PA4: N1.7 P9.13 R12.1 U2.26 | length 4499
  Top Layer w6: P9.13 227.54,2638.29 414.62,2638.29 v1(414.68,2638.22) 456.12,2679.66 655.09,2679.66 802.77,2531.99 802.77,2473.08 849.13,2426.72 1253.37,2426.72 1274.17,2405.92 U2.26
  Top Layer w8: N1.7 1851.91,962.01 1926.88,962.01 1939.12,949.76 R12.1
  Bottom Layer w8: v1(414.68,2638.22) 414.68,1971.44 828.63,1557.49 1528.12,1557.49 1792.91,1292.69 N1.7
PA5: N1.8 P9.12 R11.1 U2.27 | length 4354.2
  Top Layer w6: P9.12 299.64,2610.5 v1(440.06,2610.5) 489.22,2659.67 646.11,2659.67 778.86,2526.92 778.86,2455.65 819.8,2414.72 1244.54,2414.72 1269.08,2390.17 U2.27
  Top Layer w8: R11.1@1877.47,589.79 1877.47,741.2 1897.62,761.35 1897.62,898.3 N1.8
  Bottom Layer w8: v1(440.06,2610.5) 440.06,1982.27 838.83,1583.5 1578.99,1583.5 1892.91,1269.58 N1.8
PA6: P9.3 R1.1 U2.7 | length 2498.9
  Top Layer w6: R1.1 150.33,1180.51 64.33,1266.51 64.33,1517.09 185.59,1638.35 P9.3 231.04,1638.35 507.25,1914.56 1484.66,1914.56 1539.26,1969.16 1539.26,2218.35 1506.32,2251.3 1447.77,2251.3 1427.8,2271.26 1427.8,2289.82 U2.7
PA7: P9.2 R3.1 U2.8 | length 2463.5
  Top Layer w6: R3.1 238.3,1209.57 144.54,1303.32 144.54,1509.33 173.55,1538.35 P9.2 568.93,1879.8 1491.6,1879.8 1565.13,1953.33 1565.13,2226.3 1520.05,2271.38 1449.88,2271.38 1443.55,2277.71 1443.55,2289.82 U2.8
PA8: N1.15 P4.3 P7.2 U2.9 | length 2767.1
  Top Layer w6: U2.9 1529.07,2311.43 1605.95,2234.55 1605.95,1882.99 1652.9,1836.05 1845.71,1836.05 N1.15 2002.47,1679.29 3056.95,1679.29 3102.18,1634.06 3102.18,1594.51 P7.2
  Bottom Layer w6: v1(1577.98,2262.53) 1613.83,2298.38 1853.18,2298.38 P4.3
PA9: N1.14 P4.4 P7.3 U2.10 | length 2770
  Top Layer w6: U2.10 1552.75,2327.18 1578.26,2301.67 v1(1578.26,2300.59) 1579.34,2300.59 1629.43,2250.5 1629.43,1888.64 1667.31,1850.75 1931,1850.75 N1.14 2078.26,1703.49 3093.2,1703.49 P7.3
  Bottom Layer w6: v1(1578.26,2300.59) 1595.06,2317.39 1821.58,2317.39 1955.36,2451.17 1955.36,2500.55 P4.4
PA10: N1.16 P9.6 U2.1 Y2.1 | length 2763.8
  Top Layer w6: P9.6 321.91,2032.78 583.08,2032.78 v3(586.35,2036.05) 590.16,2032.25 826.69,2032.25 1023.78,2229.34 Y2.1 Y2.1@1103.71,2221.93 ; Y2.1@1103.71,2219.86 1110.06,2219.86 1166.8,2276.6 1327.96,2276.6 1331.47,2280.12 1331.47,2280.8 1332.8,2282.13 U2.1
  Bottom Layer w8: v3(586.35,2036.05) 586.35,1938.88 877.21,1648.02 1652.1,1648.02 N1.16
PA11: N1.17 P9.7 U2.32 Y2.2 | length 2560.9
  Top Layer w6: P9.7 255.86,2066.73 v1(639.99,2066.73) 831.04,2066.73 1086.95,2322.63 1105.99,2322.63 Y2.2 ; Y2.2@1111.11,2311.98 1301.79,2311.98 1301.83,2311.94 1311.19,2311.94 U2.32
  Bottom Layer w8: v1(639.99,2066.73) 639.72,2066.46 639.72,1918.39 891.52,1666.59 1570.67,1666.59 N1.17
PA12: N1.18 P5.3 P9.8 U2.31 | length 2981.8
  Top Layer w6: P9.8 381.72,2292.59 381.72,2327.1 522.94,2468.31 570.89,2468.31 P5.3 632.48,2463.51 729.27,2366.72 1210.68,2366.72 1250.21,2327.18 U2.31
  Bottom Layer w8: P5.3 647.17,2463.51 671.03,2439.65 671.03,1923.83 906.66,1688.2 1492.28,1688.2 N1.18
PA13: N1.19 P5.4 P9.9 U2.30 | length 3000.9
  Top Layer w6: P9.9 237.54,2248.4 260.58,2248.4 P5.4 637.41,2563.51 714.7,2486.22 714.7,2420.94 756.92,2378.72 1218.55,2378.72 1254.34,2342.93 U2.30
  Bottom Layer w8: P5.4 662.59,2563.51 704.57,2521.53 704.57,1926.96 922.35,1709.18 1413.26,1709.18 N1.19
PA14: N1.10 P9.10 U2.29 | length 4169.6
  Top Layer w6: P9.10 299.25,2338.35 v1(495.42,2534.51) 494.56,2535.37 494.56,2572.91 539.67,2618.02 616.26,2618.02 734.27,2500.01 734.27,2434.97 778.53,2390.72 1224.48,2390.72 1256.51,2358.68 U2.29
  Bottom Layer w8: v1(495.42,2534.51) 494.56,2533.66 494.56,1998.28 868.3,1624.54 1732.69,1624.54 2092.91,1264.31 N1.10
PA15: N1.9 P9.11 U2.28 | length 4115
  Top Layer w6: P9.11 320.06,2438.35 v1(464.96,2583.25) 521.73,2640.02 626.1,2640.02 756.22,2509.89 756.22,2438.51 792.02,2402.72 1231.29,2402.72 1259.58,2374.42 U2.28
  Bottom Layer w8: v1(464.96,2583.25) 464.96,1993.1 852.69,1605.37 1676,1605.37 1992.91,1288.45 N1.9
PB0: C10.2 P9.4 U2.3 | length 1409.2
  Top Layer w6: P9.4 468.87,1979.74 899.19,1979.74 1067.44,2147.99 1142.62,2147.99 1246.2,2251.57 1327.49,2251.57 1332.76,2246.3 1336.6,2242.45 1336.6,2239.57 1342.53,2233.64 1345.41,2233.64 C10.2 ; C10.2@1345.41,2234.76 1349.41,2234.76 1354.22,2239.57 1354.22,2240.05 1357.74,2243.57 1363.99,2249.82 1363.99,2290.02 U2.3
PB4: N1.4 P7.11 S4.2 U2.18 | length 6835.2
  Top Layer w6: U2.18 1427.8,2443.28 1427.8,2457.7 1452.59,2482.49 1732.66,2482.49 1881.85,2333.3 1881.85,2210.26 1951.26,2140.85 2343.6,2140.85 v3(2361.33,2158.58) 2878.58,2158.58 P7.11
  Top Layer w8: S4.2 2853.25,230.93 2853.25,751.44 3232.48,1130.67 3232.48,2414.57 3209.59,2437.46 3159.24,2437.46 P7.11
  Bottom Layer w8: N1.4 1558.84,837.08 1619.99,775.93 2230.29,775.93 2361.33,906.98 v3(2361.33,2158.58)
PB6: N1.20 P9.5 U2.2 | length 2148.1
  Top Layer w6: P9.5 393.25,2004.12 v1(757.56,2004.12) 893.74,2004.12 1054.82,2165.2 1142.86,2165.2 1241.23,2263.57 1336.27,2263.57 1348.04,2275.34 1348.04,2289.82 U2.2
  Bottom Layer w8: v1(757.56,2004.12) 757.56,1907.57 936.9,1728.23 1332.3,1728.23 N1.20
PB7: N1.3 P7.10 U2.17 | length 4365.1
  Top Layer w6: U2.17 1443.55,2443.28 1443.55,2455.12 1456.73,2468.3 1715.06,2468.3 1865.16,2318.2 1865.16,2203.3 1941.88,2126.58 v3(2390.33,2126.58) 2407.93,2144.18 2889.65,2144.18 3083.82,2338.35 P7.10
  Bottom Layer w8: N1.3 1538.26,757.66 2235.24,757.66 2390.33,912.76 v3(2390.33,2126.58)
PB10: J1.A7 J1.B7 N1.12 P7.9 U2.16 | length 5718.3
  Top Layer w6: U2.16 1472.34,2421.67 1474.22,2419.79 1681.62,2419.79 1809.91,2291.51 1809.91,2112.89 1859.92,2062.88 2463.61,2062.88 2473.61,2072.88 v1(2476.13,2072.88) ; J1.B7 1879.92,353.78 1869.14,364.56 1869.14,392.06 1888.48,411.4 1919.39,411.4 1925.45,405.34 1925.45,383.77 1915.45,373.77 1915.45,356.66 1919.29,352.82 J1.A7 ; N1.12 v3(2979.48,1788.84) ; v1@2477.38,2072.88 2992.88,2072.88 P7.9
  Bottom Layer w6: v1(1925.45,382.39) 1925.45,384.9 1915.45,394.9 1915.45,435.91 1968.86,489.32 2120.91,489.32 2574.47,942.89 2574.47,2028.31 2539.91,2062.88 2488.64,2062.88 2478.64,2072.88 v1(2476.13,2072.88) ; v3(2979.48,1788.84) 2979.48,2059.48 P7.9
PB11: J1.A6 J1.B6 N1.13 P7.8 U2.15 | length 5704
  Top Layer w6: U2.15 1472.34,2405.92 1474.22,2407.79 1676.65,2407.79 1797.91,2286.53 1797.91,2107.92 1854.95,2050.88 2463.61,2050.88 2473.61,2040.88 v1(2476.13,2040.88) 3060.88,2040.88 P7.8 ; v1(1893.45,382.39) 1894.83,382.39 1903.45,373.77 1903.45,356.66 1899.61,352.82 J1.A6 1899.61,266.26 1906.15,259.71 1936.38,259.71 1939.89,263.23 1939.89,306.12 J1.B6 ; N1.13 2145.39,1736.36 2992,1736.36 v3(3018.64,1763)
  Bottom Layer w6: v1(1893.45,382.39) 1893.45,384.9 1903.45,394.9 1903.45,440.88 1963.89,501.32 2115.94,501.32 2562.47,947.86 2562.47,2023.34 2534.94,2050.88 2488.64,2050.88 2478.64,2040.88 v1(2476.13,2040.88) ; v3(3018.64,1763) 3018.64,1998.63 P7.8
PB23: N1.5 P7.13 S2.2 U2.19 | length 6551.4
  Top Layer w6: U2.19 1411.54,2458.41 1449.26,2496.13 1747.61,2496.13 1899.69,2344.04 1899.69,2216.52 1961.96,2154.25 2308.99,2154.25 2317.92,2163.18 v3@2320.39,2163.18 ; v3(2322.13,2167.39) 2340.76,2186.02 2863.2,2186.02 3071.46,2394.28 3071.46,2551.46 P7.13 3206.33,2638.35 3272.43,2572.25 3272.43,1098.77 2917.47,743.81 S2.2
  Bottom Layer w8: N1.5 1701.56,794.37 2223.96,794.37 2322.13,892.54 v3(2322.13,2167.39)
V5V: C1.1 S1.2 U1.3 | length 416.4
  Top Layer w30: U1.3@2509.52,556.89 C1.1@2613.09,556.89 ; S1.2 2625.65,248.03 C1.1@2625.65,556.89
VCC: C8.2 P3.8 U2.6 | length 1237.4
  Top Layer w8: U2.6 1411.54,2268.89 1453.14,2227.29 1453.14,2221.75 C8.2@1455.42,2219.48
  Top Layer w20: C8.2 1463.09,2218.32 1496.21,2218.32 v3(1497.37,2217.17)
  Bottom Layer w20: v3(1497.37,2217.17) 1661.88,2217.17 1710.23,2265.52 1864.58,2265.52 1915.98,2316.92 2107.7,2316.92 2147.6,2356.83 2147.6,2516.09 2195.03,2563.51 P3.8
VDCIA: C6.1 C9.2 L1.2 U2.4 U2.25 | length 868.1
  Top Layer w6: C6.1 1244.98,2453.74 1277.05,2421.67 U2.25
  Top Layer w8: 1351.76,2194.06 1354.6,2191.22 1367.91,2191.22 ; 1351.92,2198.12 1355,2195.03 1371.73,2195.03 ; 1361.26,2184.56 1367.91,2191.22 ; C9.2@1364.58,2166.45 1367.91,2169.78 C9.2@1367.91,2183.01 ; C9.2@1367.7,2183.01 C9.2@1367.91,2183.01 ; U2.4 1380.05,2203.35 ; C9.2@1367.91,2183.01 1367.91,2191.22 ; C9.2@1367.91,2183.01 1368.67,2183.01 1380.05,2194.39 1380.05,2203.35 ; 1367.91,2191.22 1371.73,2195.03 ; 1371.73,2195.03 1380.05,2203.35
  Top Layer w15: v3@1251.16,2197.5 v3@1253.58,2199.91 ; v3(1256.16,2194.5) 1258.54,2196.87 1280.66,2196.87 1283.7,2199.91 1345.69,2199.91 1356.95,2188.64 1356.95,2175.77 C9.2 1361.26,2153.54 1343.75,2136.03 1341.81,2136.03 L1.2@1329.62,2123.84
  Top Layer w20: v3(1202.62,2482.94) 1202.95,2482.61 1202.95,2476.54 1205.8,2473.69 1205.8,2455.55 C6.1 ; L1.2 L1.2@1329.62,2121.98
  Bottom Layer w20: v3(1202.62,2482.94) 1236.41,2449.15 1236.41,2212.25 v3@1251.16,2197.5
VINTA: C5.1 U2.23 | length 120.8
  Top Layer w8: U2.23 C5.1@1348.55,2563.56
VSW: L1.1 U2.5 | length 334.6
  Top Layer w8: U2.5@1395.8,2291.37 U2.5 1395.8,2242.78 ; L1.1@1397.54,2119.12 L1.1@1395.8,2120.87 ; L1.1@1395.8,2120.87 1395.8,2242.78 ; L1.1@1395.8,2120.87 1395.8,2109.24 L1.1 1403.38,2106.65 1403.38,2235.2 1395.8,2242.78
X32MI: U2.22 Y1.3 | length 282.1
  Top Layer w6: U2.22 1364.3,2537.76 1377.1,2550.56 1377.1,2667.59 1411.07,2701.57 Y1.3
X32MO: U2.21 Y1.1 | length 216.8
  Top Layer w6: U2.21 1380.05,2528.76 1424.59,2573.3 1448.16,2573.3 1475.59,2600.73 Y1.1@1481.04,2600.73
pads on no net: J1.A8 J1.B8 N1.11 S1.0 S1.3

## Polygon pours and split planes (outlines as drawn)
GND on Top Layer "GND" (hatched Horizontal grid 8 track 8, remove dead copper, pour order 0): 0,3031.5 0,3110.24 3385.83,3110.24 3385.83,0 1692.91,0 1692.91,891.72 677.47,891.72 677.47,2002.9 -3.81,2002.9
GND on Bottom Layer "GND" (hatched Horizontal grid 8 track 8, remove dead copper, pour order 1): 0,3031.5 0,3110.24 3385.83,3110.24 3385.83,0 1692.91,0 1692.91,891.72 677.47,891.72 677.47,1999.86 -3.82,1999.86

## Keep-outs
Keep-Out Layer:
  lines w15: 0,78.74 ccw(c78.74,78.74) 78.74,0 3307.29,0 ccw(c3307.29,78.74) 3386.03,78.74 3386.03,3031.5 ccw(c3307.29,3031.5) 3307.29,3110.24 78.74,3110.24 ccw(c78.74,3031.5) 0,3031.5 0,78.74

## Other copper
Top Layer:
  rectangle net GND: 1236.75,2842.45 1326.1,2870.07
  rectangle net GND: 1254.01,2812.24 1289.45,2882.04
  pour cut-out: 1311.62,2053.47 1311.62,2147.53 1416.27,2147.53 1416.27,2053.47
Bottom Layer:
  rectangle net GND: 1326.46,2310.58 1462.64,2441.78
Multi-Layer:
  pour cut-out: 1634.59,1823.18 0,1823.18 0,1999.25 1634.6,1999.25
  pour cut-out: 1570.26,1972.01 1585.34,1987.09 1585.34,2244.26 1513.54,2316.72 1418.12,2316.73 1418.12,2238.02 1442.02,2214.12 1498.31,2214.12 1502.34,2210.1 1502.34,1972.01
  pour cut-out: 1629.02,0 0,0 0,742.27 1629.06,742.27
  pour cut-out: 3385.99,2866.07 0,2866.07 0,3110.24 3386,3110.24

## Silkscreen, mask and mechanical layers (free items; w line width, h text height)
Top Overlay:
  text "LED2" at 294.27,2713.4 h35
  text "LED1" at 2963.95,2713.71 h35
  text "PA4" at 294.27,2613.41 h35
  text "PB23" at 2952.28,2613.68 h35
  text "TX" at 2082.42,2540.17 h35
  text "VCC" at 2206.48,2540.17 h35
  text "GND" at 2533.73,2540.17 h35
  text "SWDCK" at 636.34,2538.58 h35
  text "PA5" at 294.27,2513.42 h35
  text "PB22" at 2952.28,2513.65 h35
  text "SWDIO" at 636.34,2439.94 h35
  text "RX" at 2082.42,2438.53 h35
  text "3V3" at 2206.48,2438.53 h35
  text "GND" at 2533.73,2438.53 h35
  text "PA15" at 294.27,2413.44 h35
  text "PB4" at 2987.27,2413.62 h35
  text "GND" at 636.34,2341.29 h35
  text "GND" at 2082.42,2336.88 h35
  text "+5V" at 2206.48,2336.88 h35
  text "GND" at 2533.73,2336.88 h35
  text "PA14" at 294.27,2313.45 h35
  text "PB7" at 2987.27,2313.59 h35
  text "3V3" at 636.34,2242.64 h35
  text "3V3" at 2082.42,2235.24 h35
  text "+5V" at 2206.48,2235.24 h35
  text "GND" at 2533.73,2235.24 h35
  text "PA13" at 294.27,2213.46 h35
  text "PB10" at 2958.12,2213.56 h35
  text "PA12" at 294.27,2113.47 h35
  text "PB11" at 2969.78,2113.53 h35
  text "PA11" at 294.27,2013.49 h35
  text "PB12" at 2958.12,2013.5 h35
  text "PA10" at 294.27,1913.5 h35
  text "PB13" at 2958.12,1913.47 h35
  text "PB6" at 294.27,1813.51 h35
  text "PB14" at 2958.12,1813.44 h35
  text "PB0" at 294.27,1713.52 h35
  text "PB15" at 2958.12,1713.41 h35
  text "PA6" at 294.27,1613.53 h35
  text "PA9" at 2987.27,1613.38 h35
  text "PA7" at 294.27,1513.55 h35
  text "PA8" at 2987.27,1513.36 h35
  text "GND" at 294.27,1413.56 h35
  text "GND" at 2987.27,1413.33 h35
  text "CH595X-R0-1v1" at 2376.92,803.56 h40
  text "OFF" at 2420.21,61.98 h35
  text "ON" at 2592.47,60.83 h35
Mechanical 1:
  lines w10: 3307.09,0 ccw(c3307.09,78.74) 3385.83,78.74 3385.83,3031.5 ccw(c3307.09,3031.5) 3307.09,3110.24 78.74,3110.24 ccw(c78.74,3031.5) 0,3031.5 0,78.74 ccw(c78.74,78.74) 78.74,0 3307.29,0

## Text inside footprints (layer, text, board x,y; h text height)
D1: Top Overlay "+" at 2744.12,691.72 h40 r90
D3: Top Overlay "+" at 2701.92,2678.82 h40 r90
D4: Top Overlay "+" at 823.6,2678.82 h40 r90